# Altium PCB PCB2.PcbDoc
Units mm, origin at the board's own origin, x right, y up, seen from the top; angles counter-clockwise.
Board outline 36.32 x 28.86 mm, 2 copper layers (Top Layer, Bottom Layer); 22 components, 19 nets, 111 pads, 7 vias.
Unrouted connection lines stored in the file: 1.
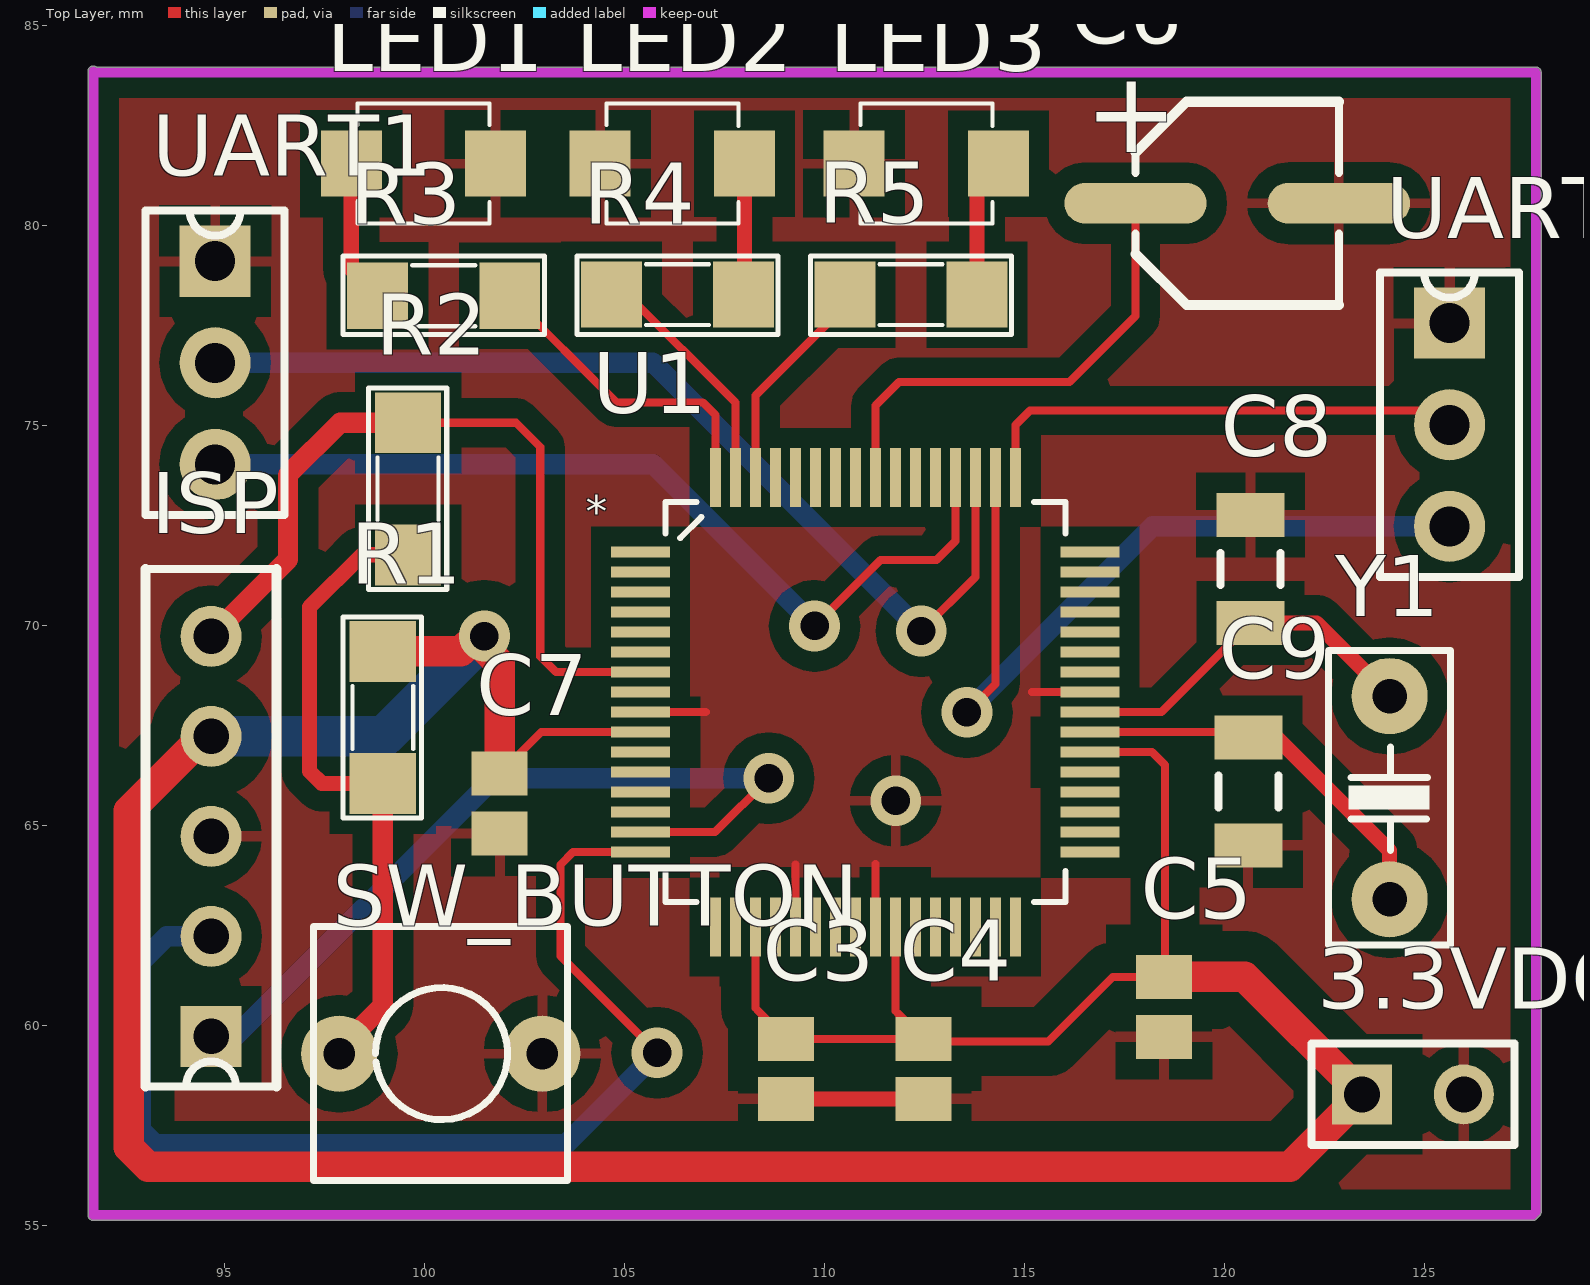
[diagram p0: Top Layer view]
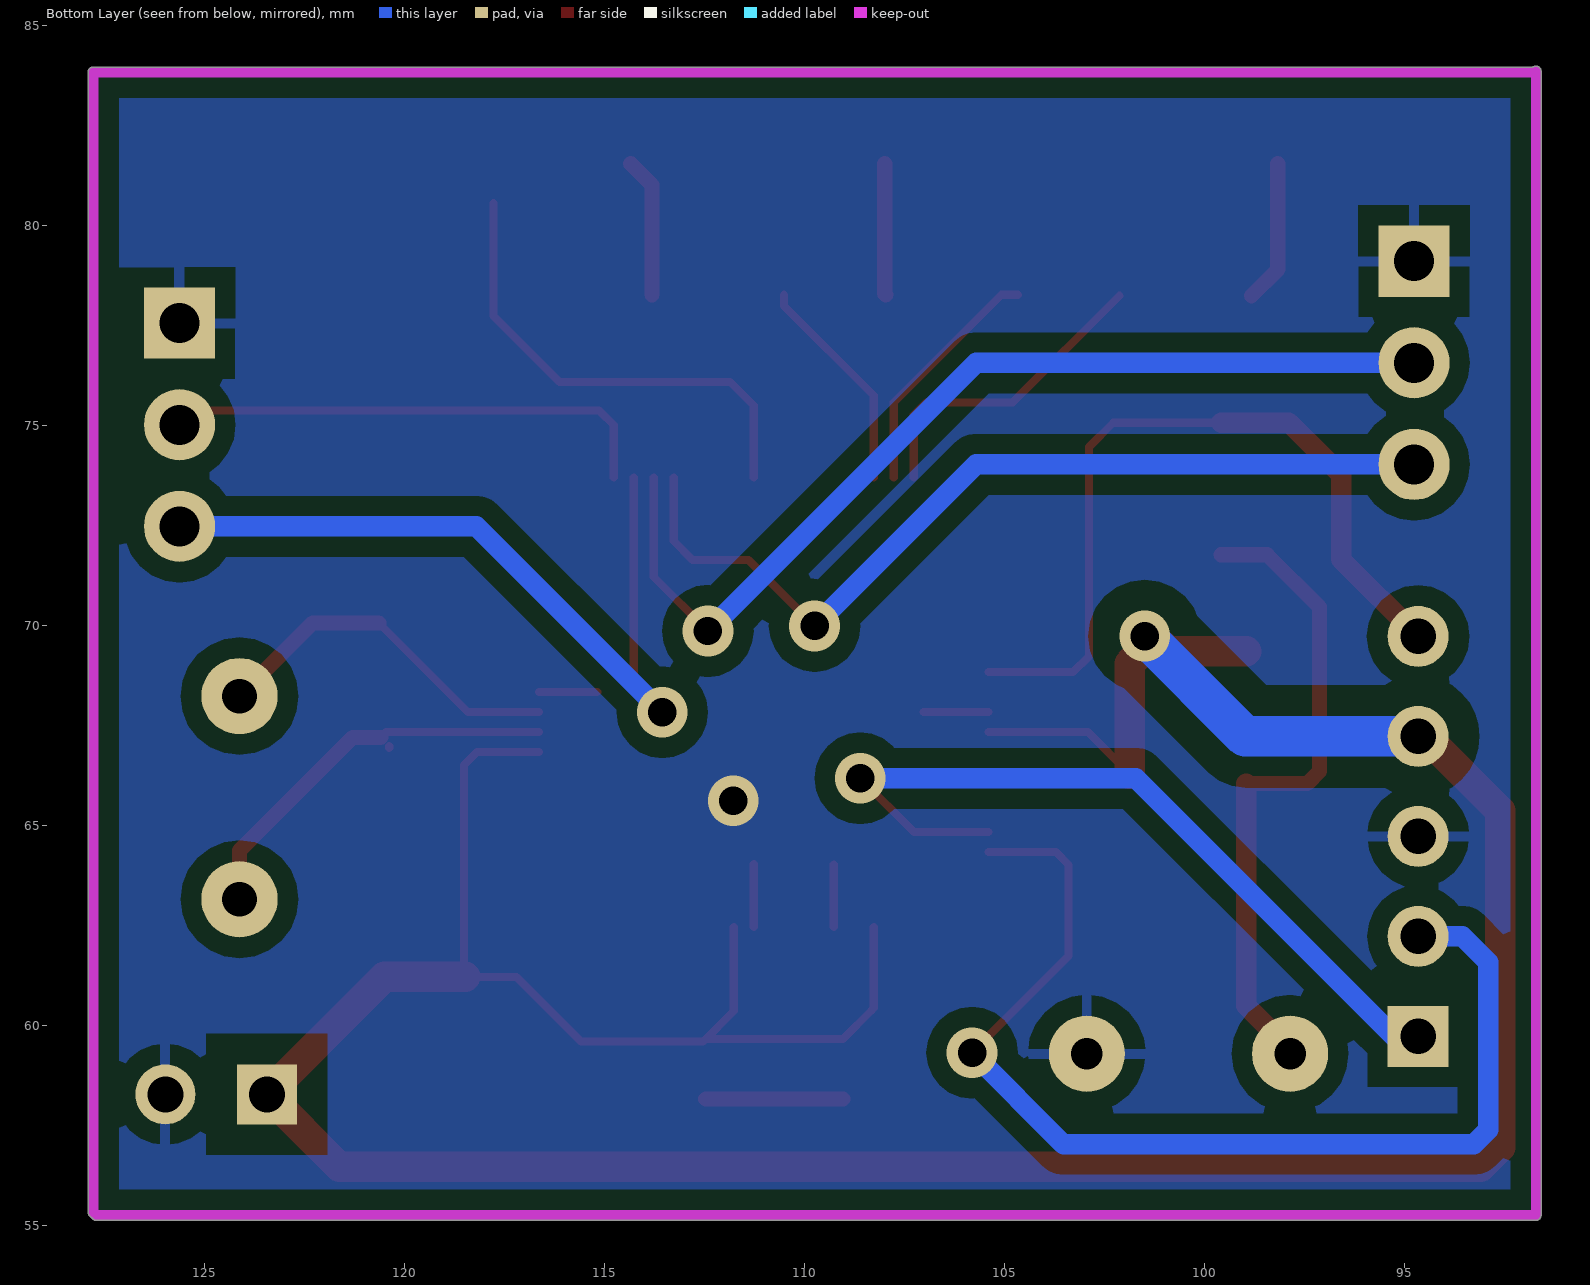
[diagram p1: Bottom Layer view, seen from below]

## Layer stack, top to bottom
Top Layer: signal copper 0.0356
Dielectric: dielectric 0.32, FR-4, Dk 4.8
Bottom Layer: signal copper 0.0356

## Board outline
91.592,55.245 ccw(c91.719,55.245) 91.719,55.118 127.711,55.118 ccw(c127.711,55.245) 127.802,55.155 127.801,55.155 127.877,55.231 ccw(c127.787,55.321) 127.915,55.321 127.915,83.82 ccw(c127.787,83.82) 127.787,83.947 91.796,83.947 ccw(c91.719,83.845) 91.592,83.845

## Design rules (kind name [scope] priority, off if disabled: settings)
Clearance C3.3VCC [InNet('3.3VDC')] p1: gap=0.762
Clearance [All] p2: gap=0.508
PolygonConnect [All] p1: connectstyle=Relief reliefconductorwidth=0.254 reliefentries=4 polygonreliefangle="90 Angle"
RoomDefinition Sheet1 [InComponentClass('Sheet1')] p1: confinementstyle=ConfineIn formatcopy=TRUE lockcomponents=FALSE outline 178.943,27.051 323.088,27.051 323.088,43.053 178.943,43.053
RoutingVias [All] p1: holewidth=0.711 width=1.27 viastyle="Through Hole" minholewidth=0.711 minwidth=1.27 maxholewidth=0.711 maxwidth=1.27
SilkscreenOverComponentPads [All] p1: minsilkscreentomaskgap=0.254
SolderMaskExpansion [All] p1: expansion=0.102
Width W3.3VCC [InNet('3.3VDC')] p1: maxlimit=1.016 minlimit=0.203 preferedwidth=0.762
Width [All] p2: maxlimit=0.508 minlimit=0.203 preferedwidth=0.381
27 further rules are at their usual default settings.

## Components (designator, comment, footprint, x,y, rotation, side; value= is the part's Value field where it differs from the comment)
3.3VDC "Header 2" HDR1X2 123.444,58.268 r0 top
C3 "Cap" C0805 109.042,58.903 r270 top
C4 "Cap" C0805 112.471,58.903 r90 top
C5 "Cap" C0805 118.491,60.452 r270 top
C6 "Cap2" "CAP 1uF SMD" 120.32,80.543 r0 top
C7 "Cap" C0805 101.879,65.532 r270 top
C8 "Cap" C1206 120.65,71.399 r270 top
C9 "Cap" C1206 120.599,65.837 r90 top
ISP "JP5" CON5 94.666,59.715 r180 top
LED1 "LED" SM-LED-GEEN 99.974,81.534 r0 top
LED2 "LED" SM-LED-GEEN 106.197,81.534 r180 top
LED3 "LED" SM-LED-GEEN 112.547,81.534 r180 top
R1 "Res1" SM-1206 98.958,67.691 r90 top
R2 "res" SM-1206 99.593,73.406 r90 top
R3 "220" SM-1206 100.482,78.232 r0 top
R4 "220" SM-1206 106.324,78.257 r180 top
R5 "220" SM-1206 112.166,78.257 r180 top
SW_BUTTON "SW" SW2 102.946,59.284 r180 top
U1 "PIC24FJ128GA306" TQFP64_10X10MC 111.023,68.072 r0 top
UART1 "JP3" CON3 94.767,79.096 r0 top
UART2 "JP3" CON3 125.628,77.546 r0 top
Y1 "XTAL" XT455k 124.13,65.684 r90 top

## Footprints (in the part's own frame and the unit in brackets; to place one, negate y for a bottom-side part, rotate by r counter-clockwise, add the part's x,y. Pads: shape width x height; smd on the part's side, far side on the other; paste and mask are expansions set on the pad)
C0805 [mm] "Chip Capacitor, Body 2.0x1.3mm, IPC High Density"
  rect 1.1x1.4 smd: 1(-0.75,0) 2(0.75,0)
  body extent -1.1,-0.72 1.1,0.72, height 1.4
C1206 [mm] "Chip Capacitor, Body 3.2x1.6mm, IPC High Density"
  rect 1.1x1.7 smd: 1(-1.35,0) 2(1.35,0)
  silkscreen extent -0.4,-0.75 0.4,0.75, body extent -1.7,-0.9 1.7,0.9, height 1.3
"CAP 1uF SMD" [mil] "TU SMD"
  oval 140x40 smd: 1(-100,0) 2(100,0)
  silkscreen extent -100,-100 100,100
CON3 [mil]
  rect 70x70 hole 39.37 unplated: 1(0,0)
  round 70 hole 39.37 unplated: 2(0,-100) 3(0,-200)
  silkscreen extent -68,-250 68,50
CON5 [mil]
  rect 60x60 hole 35: 1(0,0)
  round 60 hole 35: 2(0,-98.43) 3(0,-196.85) 4(0,-295.28) 5(0,-393.7)
  silkscreen extent -64,-460 64,49
HDR1X2 [mm] "Connector; Header; 2 Position"
  rect 1.5x1.5 hole 0.9: 1(0,0)
  round 1.5 hole 0.9: 2(2.54,0)
  silkscreen extent -1.27,-1.27 3.81,1.27
SM-1206 [mil] "Compoment SMD 120x60mil"
  rect 60x65 smd: 1(-65,0) 2(65,0)
  silkscreen extent -99,-38 99,39, body extent -83,-35 83,36, height 25
SM-LED-GEEN [mil] "Compoment SMD 120x60mil"
  rect 60x65 smd: 1(-71,0) 2(71,0)
  silkscreen extent -65,-59 65,59, body extent -63,-32 63,31, height 44
SW2 [mil] "SW button 2pin, 250x 250 mil"
  round 75 hole 31: 1(0,0) 2(200,0)
  silkscreen extent -25,-125 225,125
TQFP64_10X10MC [mil]
  rect 58x11 smd: 1(-221.22,147.64) 2(-221.22,127.95) 3(-221.22,108.27) 4(-221.22,88.58) 5(-221.22,68.9) 6(-221.22,49.21) 7(-221.22,29.53) 8(-221.22,9.84) 9(-221.22,-9.84) 10(-221.22,-29.53) 11(-221.22,-49.21) 12(-221.22,-68.9) 13(-221.22,-88.58) 14(-221.22,-108.27) 15(-221.22,-127.95) 16(-221.22,-147.64) 33(221.22,-147.64) 34(221.22,-127.95) 35(221.22,-108.27) 36(221.22,-88.58) 37(221.22,-68.9) 38(221.22,-49.21) 39(221.22,-29.53) 40(221.22,-9.84) 41(221.22,9.84) 42(221.22,29.53) 43(221.22,49.21) 44(221.22,68.9) 45(221.22,88.58) 46(221.22,108.27) 47(221.22,127.95) 48(221.22,147.64)
  rect 11x58 smd: 17(-147.64,-221.22) 18(-127.95,-221.22) 19(-108.27,-221.22) 20(-88.58,-221.22) 21(-68.9,-221.22) 22(-49.21,-221.22) 23(-29.53,-221.22) 24(-9.84,-221.22) 25(9.84,-221.22) 26(29.53,-221.22) 27(49.21,-221.22) 28(68.9,-221.22) 29(88.58,-221.22) 30(108.27,-221.22) 31(127.95,-221.22) 32(147.64,-221.22) 49(147.64,221.22) 50(127.95,221.22) 51(108.27,221.22) 52(88.58,221.22) 53(68.9,221.22) 54(49.21,221.22) 55(29.53,221.22) 56(9.84,221.22) 57(-9.84,221.22) 58(-29.53,221.22) 59(-49.21,221.22) 60(-68.9,221.22) 61(-88.58,221.22) 62(-108.27,221.22) 63(-127.95,221.22) 64(-147.64,221.22)
  silkscreen extent -197,-197 197,197
XT455k [mil] "Thach anh 455khz (Infrared)"
  round 75 hole 34: 1(-100,0) 2(100,0)
  silkscreen extent -145,-60 145,60

## Part data
3.3VDC: "Header, 2-Pin"
C3 C4 C5 C6 C7 C8 C9: "Capacitor"
ISP: library part Con5, "Connector 5"
LED1 LED2 LED3: "LED Single colour Green and Red"
R1: "Resistor"
R2: library part Res1, "Resistor"
R3 R4 R5: library part R, "Resistor 1/4W"
SW_BUTTON: library part SW2, "Switch button 2 pin"
UART1 UART2: library part Con3, "Connector 3"
Y1: "Crystal Oscillator"

## Via types
v1: diameter 1.27, hole 0.711, Top Layer to Bottom Layer, 7 vias

## Nets (pads, with @x,y where several pads share a name; then routed paths per layer and width w, separated by ;. In a path a pad name is that pad's centre, name@x,y a point inside that pad or via, vN(x,y) a via of type N, cw(c..) or ccw(c..) an arc to the next point about the centre after c; other vN are vias at no path point)
3.3VDC: 3.3VDC.1 C3.1 C4.2 C5.1 C7.1 ISP.4 R1.2 U1.10 U1.19 U1.26 U1.38 | length 91
  Top Layer w0.203: R1.2@98.958,69.203 R1.2 ; C7.1 102.919,67.322 U1.10 ; 108.273,60.421 U1.19 ; 108.324,60.371 C3.1 C4.2 ; 111.773,60.35 U1.26 ; 111.824,60.3 C4.2 ; U1.38 118.192,66.822 118.516,66.497 118.516,61.227 C5.1 117.209,61.202 115.595,59.588 112.535,59.588 C4.2
  Top Layer w0.762: ISP.4 94.472,67.215 92.608,65.352 92.608,56.947 93.096,56.46 121.636,56.46 3.3VDC.1 120.51,61.202 C5.1 ; R1.2 100.914,69.342 101.295,69.723 v1(101.498,69.723) 101.498,69.418 101.879,69.037 C7.1
  Bottom Layer w1.016: ISP.4 98.991,67.215 v1(101.498,69.723)
GND: 3.3VDC.2 C3.2 C4.1 C5.2 C6.2 C7.2 C8.1 C9.1 ISP.3 LED1.2 LED2.2 LED3.2 SW_BUTTON.1 U1.9 U1.20 U1.25 U1.41 UART1.1 UART2.1 | length 8.1
  Top Layer w0.203: U1.9 107.032,67.822 ; U1.25 111.273,64.029 ; 115.185,68.322 U1.41
  Top Layer w0.381: C3.2 C4.1
  other v1: 111.785,65.608
LED1: R3.2 U1.64 | length 7.9
  Top Layer w0.203: R3.2 104.8,75.565 106.959,75.565 107.273,75.251 U1.64
LED2: R4.2 U1.63 | length 6.1
  Top Layer w0.203: R4.2 105.081,78.257 107.773,75.565 U1.63
LED3: R5.2 U1.62 | length 5.5
  Top Layer w0.203: U1.62 108.273,75.736 110.515,77.978 R5.2
NetC6_1: C6.1 U1.56 | length 12
  Top Layer w0.203: U1.56 111.273,75.485 111.862,76.073 116.129,76.073 117.78,77.724 C6.1
NetLED1_1: LED1.1 R3.1 | length 3.6
  Top Layer w0.381: LED1.1 98.171,78.892 R3.1
NetLED2_1: LED2.1 R4.1 | length 3.3
  Top Layer w0.381: R4.1 108.001,78.283 LED2.1
NetLED3_1: LED3.1 R5.1 | length 3.5
  Top Layer w0.381: R5.1 113.817,81.001 LED3.1
NetR1_1: R1.1 R2.1 SW_BUTTON.2 | length 16.3
  Top Layer w0.381: R1.1 97.434,66.04 97.13,66.345 97.13,70.448 98.437,71.755 R2.1
  Top Layer w0.508: SW_BUTTON.2 97.815,59.334 98.958,60.477 R1.1
OSCI: C9.2 U1.39 Y1.1 | length 10
  Top Layer w0.203: U1.39 120.464,67.322 C9.2 ; C9.2@120.387,66.933 C9.2@120.387,66.98
  Top Layer w0.381: C9.2 121.307,67.187 124.13,64.364 Y1.1
OSCO: C8.2 U1.40 Y1.2 | length 9.2
  Top Layer w0.203: U1.40 118.423,67.822 C8.2
  Top Layer w0.381: C8.2 122.305,70.049 Y1.2
PGC: ISP.1 U1.15 | length 20.4
  Top Layer w0.203: U1.15 107.265,64.822 v1(108.61,66.167)
  Bottom Layer w0.508: ISP.1 95.275,59.715 101.727,66.167 v1(108.61,66.167)
PGD: ISP.2 U1.16 | length 28.2
  Top Layer w0.203: U1.16 103.717,64.322 103.403,64.008 103.403,61.722 v1(105.816,59.309)
  Bottom Layer w0.508: ISP.2@94.778,62.103 ISP.2 93.559,62.215 92.913,61.57 92.913,57.379 93.269,57.023 103.53,57.023 v1(105.816,59.309)
U1RX_RP22: U1.51 UART1.2 | length 24.8
  Top Layer w0.203: v1(112.42,69.85) 113.773,71.203 U1.51
  Bottom Layer w0.508: UART1.2 105.715,76.556 v1(112.42,69.85)
U1TX_RP25: U1.52 UART1.3 | length 22.6
  Top Layer w0.203: v1(109.753,69.977) 111.404,71.628 112.801,71.628 113.273,72.1 U1.52
  Bottom Layer w0.508: UART1.3 105.715,74.016 v1(109.753,69.977)
U2RX_RP24: U1.49 UART2.2 | length 12.5
  Top Layer w0.203: U1.49 114.773,74.997 115.138,75.362 125.273,75.362 UART2.2
U2TX_RP23: U1.50 UART2.3 | length 20.2
  Top Layer w0.203: v1(113.563,67.818) 114.273,68.528 U1.50
  Bottom Layer w0.508: v1(113.563,67.818) 118.212,72.466 UART2.3
VPP: ISP.5 R2.2 U1.7 | length 19.8
  Top Layer w0.203: R2.2 102.286,75.057 102.895,74.447 102.895,69.215 103.288,68.822 U1.7
  Top Layer w0.508: ISP.5 96.587,71.637 96.587,73.753 97.892,75.057 R2.2
pads on no net: U1.1 U1.2 U1.3 U1.4 U1.5 U1.6 U1.8 U1.11 U1.12 U1.13 U1.14 U1.17 U1.18 U1.21 U1.22 U1.23 U1.24 U1.27 U1.28 U1.29 U1.30 U1.31 U1.32 U1.33 U1.34 U1.35 U1.36 U1.37 U1.42 U1.43 U1.44 U1.45 U1.46 U1.47 U1.48 U1.53 U1.54 U1.55 U1.57 U1.58 U1.59 U1.60 U1.61
copper on no net: | length 1.6
  Top Layer w0.203: 109.273,62.453 109.273,64.011

## Polygon pours and split planes (outlines as drawn)
GND on Bottom Layer "Keep-Out Layer-No Net" (solid, pour order 6): 91.719,83.845 127.762,83.845 127.787,83.82 127.711,83.744 127.711,55.245 91.846,55.245
GND on Top Layer "Keep-Out Layer-No Net" (solid, pour order 8): 91.719,83.82 127.787,83.82 127.787,55.423 127.61,55.245 91.719,55.245

## Keep-outs
Keep-Out Layer:
  lines w0.254: 91.719,83.82 127.787,83.82 127.787,55.423 127.787,55.321 127.711,55.245 91.719,55.245 91.719,83.845

## Text inside footprints (layer, text, board x,y; h text height)
C6: Top Overlay "+" at 116.51,81.813 h2.03
U1: Top Overlay "*" at 104.033,72.453 h0.79; Mechanical 1 "*" at 104.033,72.453 h0.79